# Altium PCB EQF1248.PcbDoc
Units mil, origin at the board's own origin, x right, y up, seen from the top; angles counter-clockwise.
Board outline 2495 x 4497 mil, 2 copper layers (Top Layer, Bottom Layer); 85 components, 59 nets, 303 pads, 58 vias.
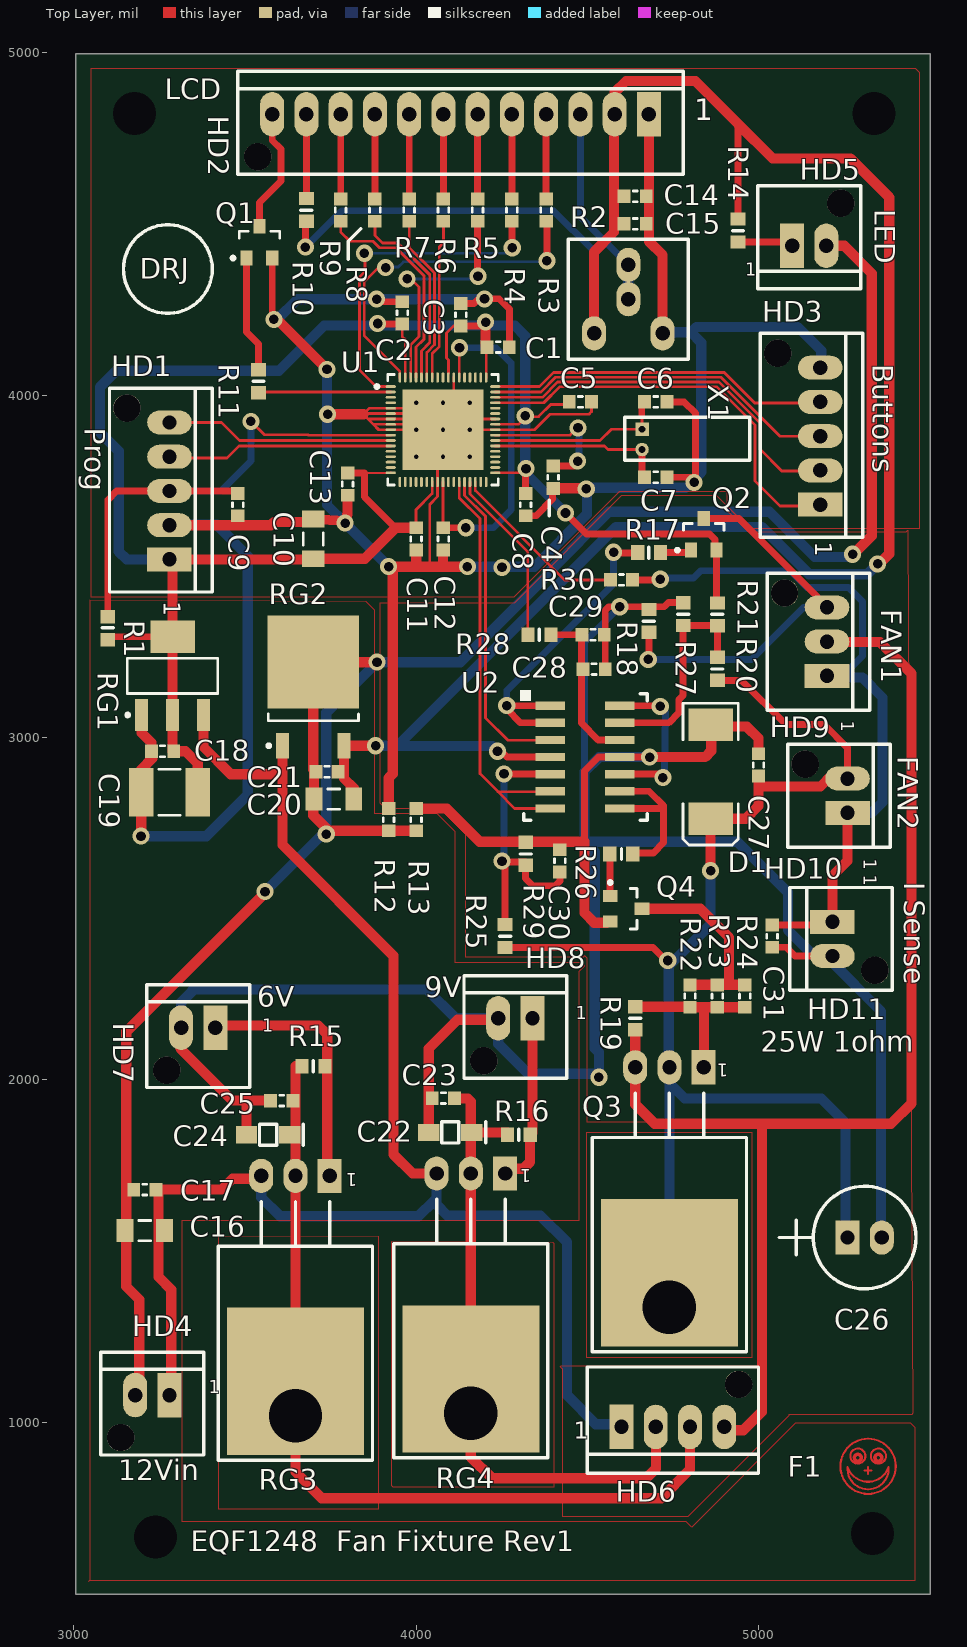
[diagram p0: Top Layer view]
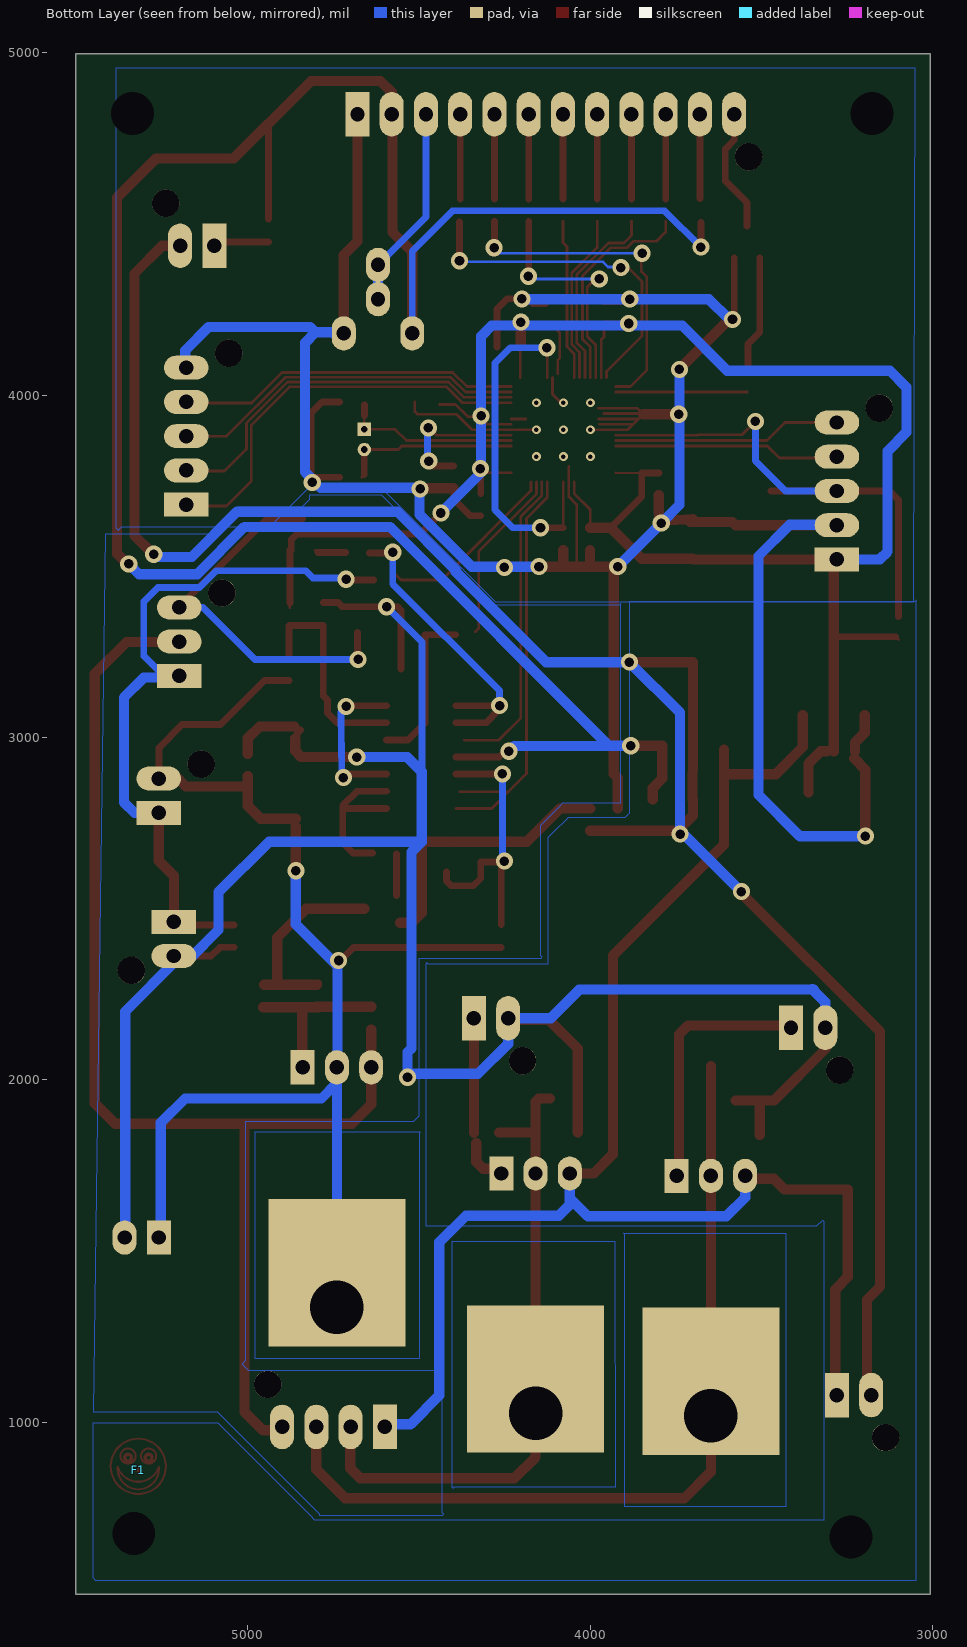
[diagram p1: Bottom Layer view, seen from below]

## Layer stack, top to bottom
Top Layer: signal copper 1.4
Dielectric: dielectric 12.6, FR-4, Dk 4.8
Bottom Layer: signal copper 1.4

## Board outline
3007,4996 3007,499 5502,499 5502,4996

## Design rules (kind name [scope] priority, off if disabled: settings)
Clearance "Poly Clearance" [InNamedPolygon('TopFGND') Or  InNamedPolygon('Bottom6V') Or  InNamedPolygon('Bottom9V') Or  InNamedPolygon('TopGND') Or  InNamedPolygon('BottomCGND') Or  InNamedPolygon('TopCGND') Or  InNamedPolygon('BottomGND') Or  InNamedPolygon('Top6V') Or  InNamedPolygon('Top9V') Or  InNamedPolygon('BottomFGND')] p1: gap=15
Clearance Clearance_U1 [(InComponent('U1'))] p2: gap=6
Clearance "Clearance All" [All] p3: gap=6
HoleSize [All] p1: absolutevalues=TRUE maxlimit=160 minlimit=1 maxpercent=80.000 minpercent=20.000
PolygonConnect [All] p1: connectstyle=Relief reliefconductorwidth=10 reliefentries=4 polygonreliefangle="90 Angle"
RoomDefinition U_FanControl [InComponentClass('U_FanControl')] p1 off: confinementstyle=ConfineIn formatcopy=TRUE lockcomponents=FALSE outline 0,0 2000,0 2000,1000 0,1000
RoomDefinition "U_Display Buttons" [InComponentClass('U_Display Buttons')] p2 off: confinementstyle=ConfineIn formatcopy=TRUE lockcomponents=FALSE outline 0,0 2000,0 2000,1000 0,1000
RoomDefinition U_Cypress [InComponentClass('U_Cypress')] p3 off: confinementstyle=ConfineIn formatcopy=TRUE lockcomponents=FALSE outline 0,0 2000,0 2000,1000 0,1000
RoutingVias [All] p1: holewidth=28 width=50 viastyle="Through Hole" minholewidth=28 minwidth=50 maxholewidth=28 maxwidth=50
SilkToSilkClearance [All] p1: silktosilkclearance=2
SilkscreenOverComponentPads [All] p1: minsilkscreentomaskgap=2
SolderMaskExpansion [All] p1: expansion=4
Width [All] p1: maxlimit=80 minlimit=6 preferedwidth=8 toplayer_maxwidth=50 bottomlayer_minwidth=8 minimp=50.000000 maximp=50.000000 favimp=50.000000
25 further rules are at their usual default settings.

## Classes and differential pairs
component class U_Cypress: C1 C2 C3 C4 C5 C6 C7 C8 C9 C10 C11 C12 C13 F1 HD1 R1 U1 X1
component class "U_Display Buttons": C14 C15 HD2 HD3 Q1 R2 R3 R4 R5 R6 R7 R8 R9 R10 R11 R12 R13
component class U_FanControl: C6 C16 C17 C18 C19 C20 C21 C22 C23 C24 C25 C27 C28 C29 C30 C31 D1 HD4 HD5 HD6 HD7 HD8 HD9 HD10 HD11 Q2 Q3 Q4 R14 R15 R16 R17 R18 R19 R20 R21 R22 R23 R24 R25 R26 R27 R28 R29 R30 RG1 RG2 RG3 RG4 U2

## Components (designator, comment, footprint, x,y, rotation, side; value= is the part's Value field where it differs from the comment)
C1 "CAP_NON_POLAR_SMT" 0603 4240,4140 r0 top
C2 "CAP_NON_POLAR_SMT" 0603 3960,4240 r90 top
C3 "CAP_NON_POLAR_SMT" 0603 4131,4234.48 r90 top
C4 "CAP_NON_POLAR_SMT" 0603 4400,3760 r270 top
C5 "CAP_NON_POLAR_SMT" 0603 4480,3980 r0 top
C6 "22pF_0603" 0603 4700,3980 r0 top
C7 "22pF_0603" 0603 4700,3760 r0 top
C8 "CAP_NON_POLAR_SMT" 0603 4320,3680 r270 top
C9 "CAP_NON_POLAR_SMT" 0603 3480,3680 r270 top
C10 "CAP_NON_POLAR_SMT" 1206 3700,3580 r90 top
C11 "CAP_NON_POLAR_SMT" 0603 4000,3580 r270 top
C12 "CAP_NON_POLAR_SMT" 0603 4080,3580 r270 top
C13 "CAP_NON_POLAR_SMT" 0603 3800,3740 r270 top
C14 "CAP_NON_POLAR_SMT" 0603 4640,4580 r0 top
C15 "1.0uF_0603_16V" 0603 4640,4500 r0 top
C16 "CAP_NON_POLAR_SMT" 1206 3208,1560 r180 top
C17 "CAP_NON_POLAR_SMT" 0603 3208,1680 r180 top
C18 "CAP_NON_POLAR_SMT" 0603 3260,2960 r180 top
C19 "CAP_NON_POLAR_SMT" 1812 3280,2840 r180 top
C20 "CAP_NON_POLAR_SMT" 1206 3760,2820 r180 top
C21 "CAP_NON_POLAR_SMT" 0603 3740,2900 r180 top
C22 "10UF_TANT_16V" EIA3216-18 4100,1847 r180 top
C23 "CAP_NON_POLAR_SMT" 0603 4080,1947 r180 top
C24 "10UF_TANT_16V" EIA3216-18 3568,1840 r180 top
C25 "CAP_NON_POLAR_SMT" 0603 3608,1940 r180 top
C26 "100UF_RP_35V_100" CAP_100RP42 5260,1540 r0 top
C27 "CAP_NON_POLAR_SMT" 0603 5000,2920 r90 top
C28 "CAP_NON_POLAR_SMT" 0603 4520,3200 r0 top
C29 "CAP_NON_POLAR_SMT" 0603 4517,3300 r0 top
C30 "CAP_NON_POLAR_SMT" 0603 4420,2640 r90 top
C31 "CAP_NON_POLAR_SMT" 0603 5040,2420 r270 top
D1 "1N4001" DSO-C2/X3.3 4860,2900 r270 top
F1 "FIDUCIAL_SMILEY" FIDUCIAL_SMILEY 5320,860 r180 bottom
HD1 "HDR5PIN100SHRD" HDR5PIN100SHRD 3280,3520 r90 top
HD2 "HDR12PIN100SHRD" HDR12PIN100SHRD 4680,4820 r180 top
HD3 "HDR5PIN100SHRD" HDR5PIN100SHRD 5180,3680 r90 top
HD4 "HDR2PIN100SHRD" HDR2PIN100SHRD 3280,1080 r180 top
HD5 "HDR2PIN100SHRD" HDR2PIN100SHRD 5098,4436 r0 top
HD6 "HDR4PIN100SHRD" HDR4PIN100SHRD 4600,987 r0 top
HD7 "HDR2PIN100SHRD" HDR2PIN100SHRD 3414,2153 r180 top
HD8 "HDR2PIN100SHRD" HDR2PIN100SHRD 4340,2180 r180 top
HD9 "HDR3PIN100SHRD" HDR3PIN100SHRD 5200,3180 r90 top
HD10 "HDR2PIN100SHRD" HDR2PIN100SHRD 5260,2780 r90 top
HD11 "HDR2PIN100SHRD" HDR2PIN100SHRD 5216,2462 r270 top
Q1 "NPN_TRANSISTOR" SOT23-3 3505.2,4400 r90 top
Q2 "PNP_TRANSISTOR" SOT23-3 4802.6,3547.09 r90 top
Q3 "TIP32" TO-220-NORMAL 4840,2037 r180 top
Q4 "2N4401_SOT23" SOT23-3 4567.09,2537.4 r0 top
R1 "R0603REFLOW_5%_1/8WATT" RC0603REFLOW-IPC 3100,3320 r270 top
R2 "POT 6MM 10K" "6MM POT" 4520,4180 r0 top
R3 "Resistor_0603_5%" 0603 4380,4540 r90 top
R4 "Resistor_0603_5%" 0603 4280,4540 r90 top
R5 "Resistor_0603_5%" 0603 4180,4540 r90 top
R6 "Resistor_0603_5%" 0603 4080,4540 r90 top
R7 "Resistor_0603_5%" 0603 3980,4540 r90 top
R8 "Resistor_0603_5%" 0603 3880,4540 r90 top
R9 "Resistor_0603_5%" 0603 3780,4540 r90 top
R10 "R0603REFLOW_5%" RC0603REFLOW-IPC 3680,4540 r90 top
R11 "R0603REFLOW_5%" RC0603REFLOW-IPC 3540,4040 r90 top
R12 "Resistor_0603_5%" 0603 3920,2760 r90 top
R13 "Resistor_0603_5%" 0603 4000,2760 r270 top
R14 "R0603REFLOW_5%" RC0603REFLOW-IPC 4940,4480 r90 top
R15 "R0603REFLOW_5%" RC0603REFLOW-IPC 3700,2040 r0 top
R16 "R0603REFLOW_5%" RC0603REFLOW-IPC 4300,1840 r0 top
R17 "R0603REFLOW_5%" RC0603REFLOW-IPC 4680,3540 r0 top
R18 "R0603REFLOW_5%" RC0603REFLOW-IPC 4680,3340 r90 top
R19 "R0603REFLOW_5%" RC0603REFLOW-IPC 4640,2180 r90 top
R20 "R0603REFLOW_5%" RC0603REFLOW-IPC 4880,3200 r90 top
R21 "R0603REFLOW_5%" RC0603REFLOW-IPC 4880,3360 r270 top
R22 "Resistor_0603_1%" 0603 4800,2245 r90 top
R23 "Resistor_0603_1%" 0603 4880,2245 r90 top
R24 "Resistor_0603_1%" 0603 4960,2245 r90 top
R25 "R0603REFLOW_5%" RC0603REFLOW-IPC 4260,2420 r90 top
R26 "R0603REFLOW_5%" RC0603REFLOW-IPC 4600,2660 r180 top
R27 "R0603REFLOW_5%" RC0603REFLOW-IPC 4780,3360 r90 top
R28 "R0603REFLOW_5%" RC0603REFLOW-IPC 4360,3300 r0 top
R29 "R0603REFLOW_5%" RC0603REFLOW-IPC 4320,2660 r90 top
R30 "Resistor_0603_5%" 0603 4600,3460 r0 top
RG1 "LM1117SPX-3.3_SOT223" SOT-223 3289,3180 r90 top
RG2 "REGULATOR_DPAK" DPAK 3610.24,2975.91 r90 top
RG3 "LM1085_TO220" TO-220-NORMAL 3748,1720 r180 top
RG4 "LM1085_TO220" TO-220-NORMAL 4260,1727 r180 top
U1 "CY8C3246LTI-128 QFN68" QFN68_8x8-MD 4078.74,3898.74 r0 top
U2 "LM324_SOIC14" SOIC14REFLOW-IPC 4495,2943 r270 top
X1 "32.768KHZ_CRYSTAL" .03_Small_Footprint_CRYSTAL 4660,3900 r270 top

## Footprints (in the part's own frame and the unit in brackets; to place one, negate y for a bottom-side part, rotate by r counter-clockwise, add the part's x,y. Pads: shape width x height; smd on the part's side, far side on the other; paste and mask are expansions set on the pad)
"6MM POT" [mil]
  oval 70x100 hole 42: 1(0,0) 2(100,100) 3(100,200) 4(200,0)
  silkscreen extent -75,-75 275,275
0603 [mm] "Chip Resistor, 2-Leads, Body 1.6x0.8mm, IPC Medium Density"
  rect 0.95x1 smd: 1(-0.825,0) 2(0.825,0)
  silkscreen extent -0.15,-0.4 0.15,0.4
1206 [mm] "Chip Resistor, 2-Leads, Body 3.1x1.6mm, IPC Medium Density"
  rect 1.25x1.7 smd: 1(-1.475,0) 2(1.475,0)
  silkscreen extent -0.45,-0.75 0.45,0.75, body extent -1.63,-0.82 1.62,0.82, height 0.7
1812 [mm] "Chip Capacitor, 2-Leads, Body 4.5x3.2mm, IPC Low Density"
  rect 1.8x3.6 smd: 1(-2.1,0) 2(2.1,0)
  silkscreen extent -0.8,-1.7 0.8,1.7
.03_Small_Footprint_CRYSTAL [mm] "Small Footprint_ECS-.327-12.5-13"
  rect 1x1 hole 0.5: 1(0,0)
  round 1 hole 0.5: 2(1.5,0)
  silkscreen extent -0.89,-1.27 2.29,8, body extent -0.38,-0.35 1.71,7.67, height 2.1
CAP_100RP42 [mil]
  rect 70x100 hole 42: 1(0,0)
  oval 70x100 hole 42: 2(100,0)
  silkscreen extent -200,-150 200,150
DPAK [mm] "D-PAK, 3-Pads, Body 6.2x6.7mm (max), IPC Medium Density"
  rect 1.9x0.95 smd: 1(0,0) 3(0,-4.56)
  rect 6.9x6.8 smd: 4(6.2,-2.28)
  silkscreen extent -0.12,-5.63 2.35,1.15, body extent -0.42,-5.56 9.52,0.98, height 2.28
DSO-C2/X3.3 [mm] "DO-214-AB/SMC; 2 C-Bend Leads; Body 7.9 x 5.9 mm, inc. leads (LxW)"
  rect 2.4x3.3 smd: 1(-3.475,0) 2(3.475,0)
  silkscreen extent -5.07,-2.05 5.43,2.05
EIA3216-18 [mil]
  rect 62x50 smd: 1(-63,0) 2(63,0)
  silkscreen extent -103,-31 25,31
FIDUCIAL_SMILEY [mil]
  Bottom Layer circle w6: c-30,42 r22
  Bottom Layer circle w10: c-30,37 r10
  Bottom Layer circle w6: c30,42 r22
  Bottom Layer circle w10: c30,37 r10
  Bottom Layer circle w6: c0,12 r80.71
  Bottom Layer pour cut-out: -60,110 -105,65 -105,-40 -55,-90 50,-90 105,-40 105,60 55,110
  Bottom Layer lines w6: 10,0 -10,0 ; 0,-10 0,10 ; 60,10 cw(c0,30) -60,10 ccw(c0,5) 60,10
HDR2PIN100SHRD [mil]
  rect 70x130 hole 42: 1(0,0)
  oval 70x130 hole 42: 2(100,0)
  round 80 hole 80 unplated: 3(142,124)
  silkscreen extent -100,-125 200,175, body extent -92,-133 192,180, height 400
HDR3PIN100SHRD [mil]
  rect 70x130 hole 42: 1(0,0)
  oval 70x130 hole 42: 2(100,0) 3(200,0)
  round 80 hole 80 unplated: 4(242,124)
  silkscreen extent -100,-125 300,175, body extent -92,-138 292,175, height 400
HDR4PIN100SHRD [mil]
  rect 70x130 hole 42: 1(0,0)
  oval 70x130 hole 42: 2(100,0) 3(200,0) 4(300,0)
  round 80 hole 80 unplated: 5(342,124)
  silkscreen extent -100,-135 400,175, body extent -95,-138 390,175, height 400
HDR5PIN100SHRD [mil]
  rect 70x130 hole 42: 1(0,0)
  oval 70x130 hole 42: 2(100,0) 3(200,0) 4(300,0) 5(400,0)
  round 80 hole 80 unplated: 6(442,124)
  silkscreen extent -95,-125 500,175, body extent -92,-138 492,175, height 400
HDR12PIN100SHRD [mil]
  rect 70x130 hole 42: 1(0,0)
  oval 70x130 hole 42: 2(100,0) 3(200,0) 4(300,0) 5(400,0) 6(500,0) 7(600,0) 8(700,0) 9(800,0) 10(900,0) 11(1000,0) 12(1100,0)
  round 80 hole 80 unplated: 13(1142,124)
  silkscreen extent -100,-125 1200,175, body extent -92,-133 1192,180, height 400
QFN68_8x8-MD [mm] "QFN, 68-Leads, Body 8.1x8.1mm (max), Pitch 0.40mm, Medium Density"
  oval 0.75x0.2 smd: 1(-3.875,3.2) 2(-3.875,2.8) 3(-3.875,2.4) 4(-3.875,2) 5(-3.875,1.6) 6(-3.875,1.2) 7(-3.875,0.8) 8(-3.875,0.4) 9(-3.875,0) 10(-3.875,-0.4) 11(-3.875,-0.8) 12(-3.875,-1.2) 13(-3.875,-1.6) 14(-3.875,-2) 15(-3.875,-2.4) 16(-3.875,-2.8) 17(-3.875,-3.2) 35(3.875,-3.2) 36(3.875,-2.8) 37(3.875,-2.4) 38(3.875,-2) 39(3.875,-1.6) 40(3.875,-1.2) 41(3.875,-0.8) 42(3.875,-0.4) 43(3.875,0) 44(3.875,0.4) 45(3.875,0.8) 46(3.875,1.2) 47(3.875,1.6) 48(3.875,2) 49(3.875,2.4) 50(3.875,2.8) 51(3.875,3.2)
  oval 0.2x0.75 smd: 18(-3.2,-3.875) 19(-2.8,-3.875) 20(-2.4,-3.875) 21(-2,-3.875) 22(-1.6,-3.875) 23(-1.2,-3.875) 24(-0.8,-3.875) 25(-0.4,-3.875) 26(0,-3.875) 27(0.4,-3.875) 28(0.8,-3.875) 29(1.2,-3.875) 30(1.6,-3.875) 31(2,-3.875) 32(2.4,-3.875) 33(2.8,-3.875) 34(3.2,-3.875) 52(3.2,3.875) 53(2.8,3.875) 54(2.4,3.875) 55(2,3.875) 56(1.6,3.875) 57(1.2,3.875) 58(0.8,3.875) 59(0.4,3.875) 60(0,3.875) 61(-0.4,3.875) 62(-0.8,3.875) 63(-1.2,3.875) 64(-1.6,3.875) 65(-2,3.875) 66(-2.4,3.875) 67(-2.8,3.875) 68(-3.2,3.875)
  rect 2x2 smd paste-0.15 mask-0.15: 69(-2,-2) 69(-2,0) 69(-2,2) 69(0,-2) 69(0,0) 69(0,2) 69(2,-2) 69(2,0) 69(2,2)
  silkscreen extent -5.02,-4.1 4.1,4.1, body extent -4.05,-4.05 4.05,4.05, height 1
RC0603REFLOW-IPC [mil]
  rect 39x43 smd: 1(-33,0) 2(34,0)
  silkscreen extent 0,-16 0,16
SOIC14REFLOW-IPC [mil]
  rect 24x87 smd: 1(-150,-103) 2(-100,-103) 3(-50,-103) 4(0,-103) 5(50,-103) 6(100,-103) 7(150,-103) 8(150,100) 9(100,100) 10(50,100) 11(0,100) 12(-50,100) 13(-100,100) 14(-150,100)
  silkscreen extent -195,-190 185,180
SOT23-3 [mm] "SOT23, 3-Leads, Body 3.0x2.8mm (max), Pitch 0.95mm, IPC Medium Density"
  rect 1.1x0.9 smd: 1(0,0) 2(0,-1.9) 3(2.36,-0.95)
  silkscreen extent -0.12,-2.45 1.98,1.12, body extent 0.38,-2.47 1.98,0.57, height 1.4
SOT-223 [mm] "SOT223, 4-Leads, Body 6.7x7.3mm (max), Pitch 2.30mm, IPC Medium Density"
  rect 2.4x0.95 smd: 1(-2.9,2.3) 2(-2.9,0) 3(-2.9,-2.3)
  rect 2.4x3.3 smd: 4(2.9,0)
  silkscreen extent -3.02,-3.35 1.3,3.45, body extent -1.85,-3.35 1.85,3.35, height 1.8
TO-220-NORMAL [mil]
  rect 70x100 hole 42: 1(0,0)
  oval 70x100 hole 42: 2(100,0) 3(200,0)
  rect 400x430 hole 156 copper offset 0,-100: 4(100,700)
  silkscreen extent -125,75 325,830

## Part data
C1 C2 C3 C4 C5 C8 C9 C11 C12 C13 C14 C17 C18 C21 C23 C25 C27 C28 C30: library part 264790, "Capacitor, 0.1uF, 50V, Ceramic, X7R, +/- 20%, Non-Polar, 0603, Kemet: C0603C104M5RACTU or equivalent"
C6 C7: library part 19574, "Capacitor, 22pF, 50, Ceramic, NPO, +/-5%, Non-Polar, 0603, 2, Kemet:C0603C220J5GACTU or equivalent"
C10 C16 C20: library part 265299, "Capacitor, 10uF, 50V, Ceramic, X5R, +/- 20%, Non-Polar, 1206, Taiyo Yuden: UMK316BBJ106ML-T or equivalent"
C15: library part 18838, "Capacitor, 1uF, 16V, Ceramic, X5R, +/- 10%, Non-Polar, 0603, 2, MURATA: GRM188R61C105KA93D OR EQUIVALENT"
C19: library part 265012, "Capacitor, 1uF, 50V, Ceramic, Z5U, +/- 20%, Non-Polar, 1812, Kemet: C1812C105M5UACTU or equivalent"
C22 C24: library part 10669, "Capacitor, 10uF, 16V, Tantalum, General Purpose, +/- 20%, Polar, EIA 3216-18, KEMET: T491A106M016AS or Exact Equivalent"
C26: library part 3428, "Capacitor, 100uF, 35V, Electrolytic, +/- 20%, Radial, Polar, 0.1 in., Nichicon: UVR1V101MED or Equivalent"
C29 C31: library part 265218, "Capacitor, 1uF, 50V, Ceramic, X5R, +/- 20%, SMT, Non-Polar, 0603, TDK: C1608X5R1H105M080 or equivalent"
D1: library part Diode, "Default Diode"
F1: library part 264290, "Fiducial, Smiley, PCB reference point, not a component"
HD1 HD3: library part 1770, "Header, 0.100 in., 5 pin Pins, Shrouded, AMP: 644486-5"
HD2: library part 1763, "Header, 0.1 in., 12 pins Pins, Shrouded, AMP: 1-64486-2"
HD4 HD5 HD7 HD8 HD10 HD11: library part 1766, "Header, 0.100 in., 2 Pins, Shrouded, AMP: 644486-2"
HD6: library part 1768, "Header, 0.100 in., 4 pin Pins, Shrouded, AMP: 644486-4"
HD9: library part 1767, "Header, 0.100 in., 3 pin Pins, Shrouded, AMP: 644486-3"
Q1: library part 265442, "Transistor, MMBT4401, 40V, SOT23-3, 500mA, NPN, Transistor, On Semi: MMBT4401LT1"
Q2: library part 18850, "Transistor, MMBT4403, 40V, SOT23-3, PNP, Transistor, On Semi: MMBT4403LT1"
Q3: library part 2637, "Transistor, TIP32, 40V, TO-220, 3A, PNP, Any"
Q4: library part 18848, "Transistor, MMBT4401, 40V, SOT23, 500mA, 3, NPN, Transistor, On Semi: MMBT4401LT1"
R1: library part 15593, "Resistor, 18, ThickFilm, 5%, 0603, 1/8W, Any"
R2: library part 6440, "Resistor, 10K, Carbon, 20%, 0.2 in X 0.1 in or 0.2 in X 0.2 in, 0.1W, Panasonic: EVN-D8AA03B14"
R3 R4 R5 R6 R7 R8 R9 R30: library part 18857, "Resistor, 10K, ThickFilm, 5%, 0603, 1/10W, 2, Any"
R10: library part 13093, "Resistor, 5.1, ThickFilm, 5%, 0603, 1/10W, Any"
R11: library part 2044, "Resistor, 1K, ThickFilm, 5%, 0603, 1/10W, Any"
R12 R13: library part 18844, "Resistor, 0, ThickFilm, 5%, 0603, 1/10W, 2, Any"
R14: library part 2403, "Resistor, 130, ThickFilm, 5%, 0603, 1/10W, Any"
R15 R16: library part 5495, "Resistor, 120, ThickFilm, 5%, 0603, 1/10W, Any"
R17 R18: library part 2051, "Resistor, 10K, ThickFilm, 5%, 0603, 1/10W, Any"
R19 R29: library part 2046, "Resistor, 100K, ThickFilm, 5%, 0603, 1/10W, Any"
R20: library part 2157, "Resistor, 15K, ThickFilm, 5%, 0603, 1/10W, Any"
R21: library part 5186, "Resistor, 330K, ThickFilm, 5%, 0603, 1/10W, Any"
R22 R23 R24: library part 20273, "Resistor, 750, 1%, 0603, 1/10W, 2, Any"
R25: library part 14583, "Resistor, 270K, ThickFilm, 5%, 0603, 1/10W, Any"
R26: library part 2071, "Resistor, 4.7K, ThickFilm, 5%, 0603, 1/10W, Any"
R27: library part 6345, "Resistor, 7.5K, ThickFilm, 5%, 0603, 1/10W, Any"
R28: library part 2052, "Resistor, 1M, ThickFilm, 5%, 0603, 1/10W, Any"
RG1: library part 18870, "Regulator, LM1117MPX-3.3, 3.3V, SOT223, 800mA, 4, LDO, National: LM117MPX-3.3"
RG2: library part 265303, "Regulator, L78M05CDT-TR, 5V, DPAK, 500mA, Linear, ST: L78M05CDT-TR or equivalent"
RG3 RG4: library part 283929, "Regulator, LM1085, Adjustable, TO-220, 3A, LDO, Texas Instruments"
U1: library part "CY8C3xxxLTx-xxx QFN68", "CY8C3xxxLTx-xxx 68 pin QFN"
U2: library part 1795, "IC, LM324, SOIC, 14 pin, Op-Amp, National Semiconductor"
X1: library part 19127, "Xtal, 0.7 mm, Cylinder, 2, Crystal, 32.768KHz, ECS: ECS-.327-12.5-13;Alternates require approval"

## Free pads (board coordinates)
  round 60 hole 125 unplated mask+52.5: 0(3178,4822) 0(3239,666) 0(5333,676) 0(5337,4822)

## Via types
v1: diameter 50, hole 28, Top Layer to Bottom Layer, 49 vias
v2: diameter 25.98, hole 12.99, Top Layer to Bottom Layer, tented top, 9 vias

## Nets (pads, with @x,y where several pads share a name; then routed paths per layer and width w, separated by ;. In a path a pad name is that pad's centre, name@x,y a point inside that pad or via, vN(x,y) a via of type N, cw(c..) or ccw(c..) an arc to the next point about the centre after c; other vN are vias at no path point)
3.3V: C1.1 C2.1 C3.1 C5.1 C8.1 C10.1 C11.1 C13.1 C18.1 C19.1 HD1.1 Q2.2 R1.2 R21.1 RG1.2 RG1.4 U1.17 U1.24 U1.35 U1.44 U1.52 U1.59 U1.67 | length 6451.5
  Top Layer w8: R1.2 R1.2@3108.17,3294.17 ; HD1.1@3289,3522.17 HD1.1@3294.47,3520 ; C19.1 3362.68,2915.32 ; 3850,3772 U1.17 ; v1(3888,4209) v1@3889.48,4207.52 ; C2.1@3960,4199 3960,4170 3968.5,4161.5 U1.67 ; C11.1 4000,3665 4047.24,3712.24 U1.24 ; U1.59@4095,4062 4095,4102 4089,4108 4089,4181 4110,4202 C3.1 ; U1.52 C1.1@4204.72,4126.72 ; U1.35 v1@4320,3772.76 ; U1.44 4299.74,3914.49 4312,3926.74 4331.26,3926.74 4341.51,3937 4358,3937 4393.48,3972.48 C5.1@4440,3972.48 ; R21.1@4877.4,3380 R21.1@4877.4,3393
  Top Layer w20: R1.2@3108.17,3294.17 RG1.4 ; C13.1 3850,3772 3850,3702.96 3940.48,3612.48 ; v1@3889.48,4207.52 C2.1 ; C3.1 v1@4199,4202 ; C8.1 v1@4320,3772.76 ; v1(4436.5,3655.5) 4498,3594 4857,3594 4873.16,3577.84 Q2.2@4873.16,3547.09 ; R21.1@4877.4,3393 Q2.2
  Top Layer w30: HD1.1 HD1.1@3289,3520 ; C18.1@3289,2960 RG1.2 ; RG1.2@3289,3046 RG1.2 ; HD1.1@3289,3522.17 HD1.1@3289,3520 ; C18.1@3309,2960 3327,2960 3362.68,2924.32 C19.1 ; C10.1@3698.07,3520 3294.47,3520 HD1.1@3289,3520 ; C10.1 3849.93,3521.93 3940.48,3612.48 C11.1 ; C1.1@4203,4144.52 v1(4203,4213) ; RG1.2 RG1.4 HD1.1@3289,3520
  Bottom Layer w8: v1@4319,3787 v1(4321,3785) v1@4321,3771
  Bottom Layer w30: HD1.1 3155,3520 3132,3543 3132,3836 3077,3891 3077,4023 3125,4071 3600,4071 3732,4203 4288,4203 4319,4172 v1(4319,3939) v1@4319,3787 ; v1@4321,3771 v1(4436.5,3655.5)
5V: C14.1 C15.1 C20.1 C21.1 HD2.2 R2.1 R10.1 R14.2 RG2.3 U2.4 | length 6717.8
  Top Layer w8: R10.1@3677.07,4504.07 R10.1 ; RG2.3 RG2.3@3789.86,2976 ; 4939.09,4792.91 4940,4792
  Top Layer w20: v1(3677.07,4432.07) R10.1@3677.07,4504.07 ; v1@4243.5,2965.5 4266,2943 U2.4 ; R14.2 4940,4792
  Top Layer w30: RG2.3 3789.76,2880.24 3818.07,2851.93 C20.1 ; RG2.3@3789.86,2976 v1(3882,2976) ; R2.1@4520,4220 4520,4418 4578,4476 4578,4500 4578,4753 ; HD2.2@4580,4800 HD2.2 4580,4884 4613,4917 4815,4917 4939.09,4792.91 ; 4940,4792 5041,4691 5268,4691 5382,4577 5382,3537 5352,3507 v1(5348,3507)
  Bottom Layer w8: v1@3672,4427 v1(3677.07,4432.07) ; v1@3876,2976 v1(3882,2976) v1@3884,2976
  Bottom Layer w20: v1(3677.07,4432.07) 3783,4538 4402,4538 4520,4420 R2.1@4520,4220
  Bottom Layer w30: v1@3888,2980 3884,2976 3946,2976 4585,3615 5010,3615 5148,3477 5318,3477 v1(5348,3507) v1@5352,3507 ; 3941,2975 4223,2975 v1(4238,2960)
6VDC: C24.1 C25.1 HD6.3 R15.1 RG3.2 RG3.4 | length 2505.7
  Top Layer w30: R15.1@3648,2040 3648,1940 3648,1840 RG3.2 RG3.4 3648,856 3725,779 4716,779 4800,863 HD6.3@4800,966
9VDC: C22.1 C23.1 HD6.2 R16.1 RG4.2 RG4.4 | length 1858.4
  Top Layer w30: C23.1@4118,1946 4151,1946 4160,1937 4160,1847 RG4.2 RG4.4 4160,899 4222,837 4672,837 4701,866 HD6.2@4701,958 ; C22.1 R16.1@4267,1847
12VIN: C16.1 C17.1 HD4.1 HD6.1 RG1.3 RG2.1 RG3.3 RG4.3 | length 4509.2
  Top Layer w30: HD4.1@3285,1126 3285,1388 3248,1425 3248,1680 3432,1680 3464,1712 RG3.3@3545,1712 ; RG1.3 3379.55,2972.45 3459,2893 3610,2893 ; RG2.1@3610,2964 3610,2893 ; RG4.3 3990,1727 3934,1783 3934,2363 3610,2687 3610,2893
  Bottom Layer w30: RG3.3 3548,1657 3603,1602 4007,1602 4053,1648 ; RG4.3 4060,1636 4092,1604 4363,1604 4441,1526 4441,1079 4525,995 4597,995 4589,987 HD6.1@4589,955
CGND: C1.2 C2.2 C3.2 C4.2 C5.2 C6.2 C7.2 C8.2 C9.2 C10.2 C11.2 C12.2 C13.2 C14.2 C15.2 C18.2 C19.2 HD1.2 HD2.1 HD3.5 Q1.2 R2.4 R12.2 RG1.1 U1.5 U1.6 U1.7 U1.8 U1.9 U1.25 U1.43 U1.45 U1.58 U1.69 | length 9868.7
  Top Layer w8: v1(3585,4221) v1@3594,4221 ; v1@3731,4075 v1(3740,4075) ; U1.69@3961,3945.98 U1.6 3847.98,3945.98 ; U1.69@3973,3914.49 U1.8 3875.51,3914.49 ; U1.69@3976,3930.24 U1.7 3859.76,3930.24 ; U1.69@3976,3961.73 U1.5 3863.73,3961.73 3847.98,3945.98 ; U1.69@3984,3898.74 U1.9 3891.26,3898.74 3875.51,3914.49 ; 4040,3499 4040,3681 4062.99,3703.99 U1.25 U1.69@4062.99,3792 ; v2(4078.74,3977.48) 4085.91,3977.48 U1.69@4108.43,4000 ; U1.69@4110.24,4001.81 U1.58 ; v2(4157.48,3898.74) U1.43 4345.74,3898.74 4391,3944 4505,3944 4512.48,3951.48 C5.2 ; U1.69@4188.98,3930.24 U1.45 ; C4.2@4399,3726.52 C4.2 ; 3847.98,3945.98 3846,3944 3859.76,3930.24 ; 3859.76,3930.24 3875.51,3914.49
  Top Layer w20: v1@3580,4226 Q1.2 ; v1@3892.52,4272.48 C2.2 ; C3.2 4168.96,4266.96 v1@4183,4281 ; v1@4212,4281 4243,4281 4273,4251 C1.2@4273,4140 ; C8.2 4350.52,3647.52 4399,3696 C4.2@4399,3726.52 ; C7.2 4812,3760 4816,3760 4816,3947 4783,3980 C6.2
  Top Layer w30: v1@3197.32,2720.32 C19.2 3197.32,2906.32 3230,2939 ; RG1.1 3198.45,3013.55 3227.52,2984.48 C18.2 ; HD1.2 3480,3620 3576,3620 3585,3629 3700,3629 C10.2@3708,3629 ; v1@3594,4221 v1(3740,4075) ; C10.2 v1@3793.39,3632.24 ; v1(3742,3944) 3846,3944 3831,3944 ; v1@3798,3634 3800,3661 C13.2 ; R12.2 3920,2882 3932,2894 v1@3932,3499 ; v1(3920,3499) v1@3932,3499 ; C11.2@4001,3546.52 4001,3499 ; C12.2@4079,3546.52 4079,3499 ; v1(4150,3499) 4079,3499 ; C4.2 v1@4497,3727.52 ; HD2.1@4680,4800 4680,4580 4680,4500 4680,4449 4720,4409 R2.4@4720,4220 ; v1@3932,3499 4001,3499 ; 4001,3499 4040,3499 4079,3499
  Bottom Layer w20: R2.4@4720,4173 4723.5,4176.5 4730,4183 R2.4@4753,4183 ; HD3.5@5154,4095 HD3.5@5159.5,4100.5 ; HD3.5@5166,4067 HD3.5@5166,4080 ; HD3.5@5183,4079 HD3.5@5183,4080
  Bottom Layer w30: v1(3197,2712) 3388,2712 3509,2833 3509,3530 3418,3621 HD1.2@3314,3621 ; v1@3595,4221 3654,4280 v1(3885,4280) v1@4199,4280 ; v1(3740,4075) 3740,3944 3740,3679 v1(3793,3626) v1(3920,3499) ; v1(4150,3499) 4251,3499 4346,3499 4499,3652 v1@4499,3724 ; v1@4504,3729 4787,3729 ; R2.4@4728,4158 4735,4165 4753,4183 4803,4183 ; v1@4807.5,3749.5 4833,3775 4833,4153 4803,4183 ; HD3.5@5183,4080 5183,4130 5114,4199 4819,4199 4803,4183
  other v1: 4251,3497 4497,3726 4812,3745 4200,4281
  other v2: 4000,3820 4078.74,3820 4157.48,3820 4000,3898.74 4078.74,3898.74 4000,3977.48 4157.48,3977.48
FAN_GND: C22.2 C23.2 C24.2 C25.2 C26.2 C27.2 C28.2 C29.2 C30.2 C31.2 D1.1 HD7.2 HD8.2 HD11.2 Q4.2 R13.1 R18.2 R27.2 R29.2 U2.11 | length 8078
  Top Layer w8: 3503,1940 3505,1938 ; D1.1 D1.1@4864.81,3032
  Top Layer w20: 4410,2696 4420,2696 ; 4492,2696 4492,2902 4533,2943 U2.11 v1(4682,2943) ; C28.2 4552.48,3300 4552.48,3371.52 4562.96,3382 v1(4595,3382) 4680,3382 4725,3382 4737,3394 R27.2 ; D1.1@4846,3022 D1.1@4857,3011 ; C31.2 5081.48,2387.52 5107,2362 HD11.2
  Top Layer w30: HD7.2@3328,2137 3312,2121 3312,2092 3464,1940 3503,1940 C25.2 ; C24.2 3505,1938 ; R13.1 4089.52,2792.48 4186,2696 4320,2696 4410,2696 ; C22.2 4037,1947 4037,2092 4121,2176 4240,2176 HD8.2@4260,2176 ; 4420,2696 4481,2696 ; 4492,2696 4492,2487.77 4520.77,2459 Q4.2@4556.09,2459 ; v1(4682,2943) 4844,2943 4862,2961 D1.1@4862,2997 ; D1.1@4864.81,3032 4966,3032 5000,2998 C27.2
  Bottom Layer w20: 4492,2900 4492,3279 v1(4595,3382)
  Bottom Layer w30: HD7.2 3314,2227 3351,2264 ; 3347,2264 3351,2264 ; 3352,2265 3351,2264 ; HD8.2@4232.5,2172.5 4240,2165 4240,2106 4328,2018 v1@4534,2018 ; HD8.2 4116,2180 4032,2264 3351,2264 ; v1@4534,2019 4534,2081 4522,2093 4522,2666 4492,2696 ; v1(4682,2943) 4535,2943 4492,2900 4492,2696 ; HD11.2@5167,2357 5086,2438 5086,2548 4938,2696 4492,2696 ; HD11.2@5206,2352 5358,2200 5358,1550 5364,1544 C26.2@5366,1542
  other v1: 4534,2008
GND: C16.2 C17.2 C20.2 C21.2 HD4.2 HD5.2 R12.1 R13.2 RG2.4 | length 5980.4
  Top Layer w8: RG2.4 RG2.4@3707.52,3212.48 ; C21.2@3701.93,2894.41 C21.2
  Top Layer w30: HD4.2@3192,1117 3192,1359 3154,1397 3154,1560 3154,1680 3154,2141 v1@3553,2540 ; C20.2@3700,2820 3700,2773 3745.48,2727.52 R12.1 R13.2 ; C21.2@3700,2907.52 RG2.4 v1(3886,3220) ; C20.2 C21.2@3701.93,2894.41 ; HD5.2 5250,4436 5331,4355 5331,3589 v1@5287,3545
  Bottom Layer w30: v1(3559,2550) v1@3727,2718 ; v1(3738,2718) 3738,3072 v1(3886,3220) 4128.91,3220 4393,3484.09 ; 4393,3489 4563,3659 5032,3659 5164,3527 v1@5275,3527
  other v1: 5275,3535
NetC4_1: C4.1 U1.42 | length 441.4
  Top Layer w8: U1.42 4449.99,3882.99 v1@4465,3898
  Top Layer w20: C4.1 v1@4462.48,3792.48
  Bottom Layer w8: v1@4462,3805 4471.52,3803.64 4476,3803 v1@4476,3807 ; v1(4473,3904) v1@4468,3904 ; v1@4476,3900 4472,3902 v1@4468,3904 ; v1@4468,3904 4465,3904 4462,3907 v1@4468,3904
  Bottom Layer w20: v1@4476,3807 v1@4476,3900
  other v1: 4472,3807
NetC6_1: C6.1 U1.41 X1.1 | length 514.2
  Top Layer w8: U1.41 4537.24,3867.24 4570,3900 X1.1 4660,3939 4659,3940
  Top Layer w20: 4659,3940 C6.1@4659,3971.48
NetC7_1: C7.1 U1.40 X1.2 | length 505.7
  Top Layer w8: U1.40 4550.39,3851.5 ; 4551.89,3850 4560.94,3840.94 4644.06,3840.94 X1.2@4660,3825 ; C7.1@4660,3767.52 C7.1
  Top Layer w20: C7.1@4660,3767.52 X1.2@4660,3825
NetC9_1: C9.1 HD1.3 R1.1 U1.10 | length 1538.5
  Top Layer w8: v1(3518,3923) 3557,3884 3685,3884 3686.01,3882.99 U1.10
  Top Layer w20: R1.1 3100,3694 3126,3720 HD1.3 C9.1@3472.48,3720
  Bottom Layer w20: HD1.3 3430,3720 3518,3808 v1(3518,3923)
NetC12_1: C12.1 U1.26 U1.57 | length 1024.4
  Top Layer w8: C12.1@4078.74,3612.48 U1.26 ; U1.57 v1@4125.98,4124.02
  Top Layer w20: C12.1 v1(4145.48,3612.48)
  Bottom Layer w20: v1(4127,4138) 4234,4138 4278,4094 4278,3665 4225.48,3612.48 v1(4145.48,3612.48)
NetC26_1: C26.1 C27.1 D1.2 HD10.2 Q3.2 Q3.4 R20.1 R25.1 | length 3910.6
  Top Layer w8: Q3.4@4740,1347 4745,1342 Q3.4@4782,1305 ; D1.2 D1.2@4863.19,2760 ; HD10.2@5212,2888 5252,2888 HD10.2
  Top Layer w20: R25.1 4692,2387 v1@4725,2354 ; R20.1 4951,3167 5080,3038 5192,3038 5260,2970 HD10.2
  Top Layer w30: v1(4860,2611) D1.2@4860,2740 ; D1.2 4962.19,2763.19 5000,2801 C27.1 ; 5015.52,2857 5181,2857 HD10.2@5212,2888
  Bottom Layer w30: Q3.2@4738,2058 4738,2333 4744.5,2339.5 4860,2455 v1(4860,2611) ; Q3.4 Q3.2@4740,1991 ; Q3.2@4740,2047 Q3.2 Q3.2@4740,1991 ; C26.1@5254,1566 5254,1875 5183,1946 4785,1946 Q3.2@4740,1991
  other v1: 4735,2349
NetC28_1: C28.1 C29.1 R28.2 U2.12 | length 480.9
  Top Layer w8: C29.1@4482.8,3300 C29.1
  Top Layer w20: R28.2 4482.8,3300 4482.8,3042.2 4532,2993 U2.12
NetC30_1: C30.1 R25.2 R29.1 U2.5 | length 805.4
  Top Layer w20: R25.2 v1@4260,2636 ; v1@4261,2637 4320,2637 R29.1 4320,2589 4342,2567 4406,2567 4420,2581 C30.1 ; v1@4266,2893 U2.5
  Bottom Layer w20: v1@4257,2645 v1(4257,2894)
  other v1: 4251,2639
NetC31_1: C31.1 HD9.1 HD10.1 HD11.1 R30.2 | length 2117.1
  Top Layer w8: HD9.1 HD9.1@5206,3186
  Top Layer w20: R30.2 v1@4713,3460 ; C31.1 HD11.1@5206.48,2452.48
  Top Layer w30: HD11.1 5216,2596 5260,2640 HD10.1
  Bottom Layer w8: v1@4716.5,3465.5 v1(4713,3462) ; HD10.1 HD10.1@5320,2780 ; HD10.1@5320,2763 HD10.1@5320,2780 ; 5331,2780 HD10.1@5320,2780 ; v1(4713,3462) 4713,3469 4710,3472 4710,3465 v1(4713,3462)
  Bottom Layer w20: v1@4725.5,3465.5 4810.5,3465.5 4832,3487 5092,3487 5141,3438 5263,3438 5304,3397 5304,3238 HD9.1@5245,3179
  Bottom Layer w30: HD9.1@5193,3175 5304,3175 5362,3117 5362,2811 5331,2780
NetHD1_4: HD1.4 U1.12 | length 635.9
  Top Layer w8: HD1.4@3305,3816 3448,3816 3483.5,3851.5 U1.12
NetHD1_5: HD1.5 U1.11 | length 668
  Top Layer w8: HD1.5 3432,3920 3484.76,3867.24 U1.11
NetHD2_3: HD2.3 R2.2 R2.3 | length 558
  Bottom Layer w20: HD2.3@4480,4800 4480,4520 R2.3
  Bottom Layer w30: R2.2@4620,4300 R2.3
NetHD2_4: HD2.4 R3.2 | length 227.5
  Top Layer w20: R3.2 HD2.4@4380,4800
NetHD2_5: HD2.5 R4.2 | length 227.5
  Top Layer w20: R4.2 HD2.5@4280,4800
NetHD2_6: HD2.6 R5.2 | length 227.5
  Top Layer w20: R5.2 HD2.6@4180,4800
NetHD2_7: HD2.7 R6.2 | length 227.5
  Top Layer w20: R6.2 HD2.7@4080,4800
NetHD2_8: HD2.8 R7.2 | length 227.5
  Top Layer w20: R7.2 HD2.8@3980,4800
NetHD2_9: HD2.9 R8.2 | length 227.5
  Top Layer w20: R8.2 HD2.9@3880,4800
NetHD2_10: HD2.10 R9.2 | length 227.5
  Top Layer w20: R9.2 HD2.10@3780,4800
NetHD2_11: HD2.11 R10.2 | length 226
  Top Layer w20: R10.2 HD2.11@3680,4800
NetHD2_12: HD2.12 Q1.3 | length 344.1
  Top Layer w20: Q1.3 3542.6,4561.6 3606,4625 3606,4718 3580,4744 HD2.12@3580,4800
NetHD3_1: HD3.1 U1.48 | length 1266.8
  Top Layer w8: U1.48 4372.88,3977.48 4419.4,4024 4878.4,4024 4990,3912.4 4990,3749 5063,3676 HD3.1@5239,3676
NetHD3_2: HD3.2 U1.49 | length 1119.6
  Top Layer w8: U1.49 4368.83,3993.23 4413.6,4038 4884.2,4038 5004,3918.2 5004,3842 5068,3778 HD3.2@5180,3778
NetHD3_3: HD3.3 U1.50 | length 1037.8
  Top Layer w8: U1.50 4364.78,4008.98 4407.8,4052 4890,4052 5062,3880 HD3.3
NetHD3_4: HD3.4 U1.51 | length 1002.7
  Top Layer w8: U1.51 4360.72,4024.72 4402,4066 4900,4066 4989,3977 HD3.4@5180,3977
NetHD5_1: HD5.1 R14.1 | length 162.6
  Top Layer w8: HD5.1@5087,4447 HD5.1
  Top Layer w20: R14.1 HD5.1@5087,4447
NetHD6_4: HD6.4 HD9.2 Q3.3 R19.1 | length 3554.5
  Top Layer w30: R19.1 Q3.3 4640,1929 4697,1872 5387,1872 5447,1932 5447,3186 5354,3279 HD9.2@5233,3279 ; HD6.4 4910,977 4956,977 5010,1031 5010,1869
NetHD7_1: HD7.1 R15.2 RG3.1 | length 765.8
  Top Layer w30: HD7.1@3398,2159 3668,2159 ; 3696,2159 3668,2159 ; RG3.1@3741,1749 3741,2133 3715,2159 3668,2159
NetHD8_1: HD8.1 R16.2 RG4.1 | length 447.3
  Top Layer w8: RG4.1 RG4.1@4260,1734
  Top Layer w30: RG4.1@4260,1734 RG4.1@4260,1741 ; RG4.1@4276,1741 RG4.1@4260,1741 ; 4333,1815 4333,1761 4313,1741 RG4.1@4260,1741 ; R16.2@4340,1845 HD8.1@4340,2127
NetHD9_3: HD9.3 Q2.3 R18.1 | length 1109.9
  Top Layer w20: v1@4680,3240 R18.1 ; Q2.3 4943,3640 HD9.3@5194,3389
  Bottom Layer w20: v1(4678,3228) 4979,3228 5131,3380 HD9.3
NetQ1_1: Q1.1 R11.2 | length 340.4
  Top Layer w20: Q1.1 3505.2,4183.8 3540,4149 R11.2
NetQ2_1: Q2.1 R17.2 | length 91.5
  Top Layer w8: Q2.1@4795.51,3540 Q2.1
  Top Layer w20: R17.2 Q2.1@4795.51,3540
NetQ3_1: Q3.1 R19.2 R22.1 R23.1 R24.1 | length 468.9
  Top Layer w30: R19.2 R22.1@4798.52,2214 ; R22.1@4794,2212.52 R22.1 R23.1 R24.1@4956,2212.52 ; Q3.1@4840,2047 4840,2070 4841,2071 4841,2195
NetQ4_1: Q4.1 R26.2 | length 123
  Top Layer w8: Q4.1@4566,2538.49 Q4.1
  Top Layer w20: Q4.1@4566,2538.49 R26.2
NetQ4_3: Q4.3 R22.2 R23.2 R24.2 | length 575.9
  Top Layer w20: R22.2@4794,2283.48 R22.2@4799,2278.48
  Top Layer w30: Q4.3 4830,2500 4914,2416 4914,2290 ; R22.2@4799,2278.48 R24.2@4953,2278.48
NetR3_1: R3.1 U1.68 | length 968.1
  Top Layer w8: v1@3887,4369 3849,4331 3849,4173 3952.76,4069.24 U1.68 ; R3.1 R3.1@4382,4505.52
  Top Layer w20: v1(4382,4392) R3.1@4382,4505.52
  Bottom Layer w8: v1(3911,4372) 3913,4374 3948,4374 3963,4389 4368,4389 v1@4376,4381
NetR4_1: R4.1 U1.1 | length 961.7
  Top Layer w8: v1@3851,4412 3851,4361 3835,4345 3835,4073 3883.28,4024.72 U1.1 ; v1@4280,4431 v1(4281,4430)
  Top Layer w20: v1@4280,4431 R4.1
  Bottom Layer w8: v1(3849,4414) v1@4276,4414
NetR5_1: R5.1 U1.66 | length 671.2
  Top Layer w8: v1@3984,4340 4009,4315 4009,4171 3984.25,4146.25 U1.66 ; v1@4180,4348 v1(4181,4347)
  Top Layer w20: v1@4180,4348 R5.1
  Bottom Layer w8: v1(3974,4339) v1@4175,4339
NetR6_1: R6.1 U1.62 | length 469.8
  Top Layer w8: U1.62 4047.24,4120.65 4068,4141.4 4068,4433 4080,4445 R6.1
NetR7_1: R7.1 U1.63 | length 496.2
  Top Layer w8: R7.1 3980,4431 4054,4357 4054,4147.2 4031.5,4124.7 U1.63
NetR8_1: R8.1 U1.64 | length 559
  Top Layer w8: R8.1 3880,4466 3902,4444 3947.2,4444 4040,4351.2 4040,4153 4015.75,4128.75 U1.64
NetR9_1: R9.1 U1.65 | length 634
  Top Layer w8: R9.1 3780,4476 3807,4449 3874,4449 3893,4430 3941.4,4430 4023,4348.4 4023,4163 4000,4140 U1.65
NetR11_1: R11.1 U1.2 | length 384.2
  Top Layer w8: R11.1@3541.98,4008.98 U1.2
NetR17_1: R17.1 U2.1 U2.2 | length 902.8
  Top Layer w20: v1@4257,3093 v1(4265,3093) U2.1 ; v1@4265,3083 4305,3043 U2.2 ; v1@4598,3539 R17.1@4645,3539
  Bottom Layer w20: v1(4265,3093) 4265,3137 4577,3449 v1(4577,3541)
NetR20_2: R20.2 R21.2 R27.1 U2.13 | length 635.4
  Top Layer w20: U2.13 4738,3043 4767,3072 4767,3110 4780,3123 R27.1 R21.2@4879,3327 ; R20.2 R21.2
NetR26_1: R26.1 U2.8 U2.9 | length 484.1
  Top Layer w8: R26.1 R26.1@4636,2663
  Top Layer w20: U2.8 4722,2793 ; U2.9 4681,2843 4723,2801 4723,2693 4693,2663 R26.1@4636,2663
NetR28_1: R28.1 U1.31 | length 510.7
  Top Layer w8: U1.31 4157.48,3711.32 4326,3542.8 4326,3318 R28.1@4335,3309
NetR30_1: R30.1 U1.32 | length 533.9
  Top Layer w8: U1.32 4173.23,3720.77 4434,3460 4552.52,3460 R30.1@4567.52,3475
NetU1_29: U1.29 U2.6 U2.7 | length 1266.3
  Top Layer w8: U1.29 4125.98,3700.02 4186.5,3639.5 4186.5,2894.5 4239,2842 ; U2.6@4381,2842 4239,2842 ; U2.7 4288,2793 4239,2842
NetU1_30: U1.30 U2.3 | length 906.5
  Top Layer w8: U1.30 4141.73,3707.27 4203,3646 4203,3057 4268,2992 U2.3@4368,2992
NetU2_10: U2.10 U2.14 | length 448.4
  Top Layer w20: U2.10 v1@4714,2893 ; U2.14 v1@4705,3093
  Bottom Layer w20: v1@4726,2896 4728.52,3075.04 v1(4713,3091) 4722,3091 4726,3095 v1@4726.16,3091.61
  other v1: 4721,2883
pads on no net: HD1.6 HD2.13 HD3.6 HD4.3 HD5.3 HD6.5 HD7.3 HD8.3 HD9.4 HD10.3 HD11.3 U1.3 U1.4 U1.13 U1.14 U1.15 U1.16 U1.18 U1.19 U1.20 U1.21 U1.22 U1.23 U1.27 U1.28 U1.33 U1.34 U1.36 U1.37 U1.38 U1.39 U1.46 U1.47 U1.53 U1.54 U1.55 U1.56 U1.60 U1.61

## Polygon pours and split planes (outlines as drawn)
FAN_GND on Top Layer "Fan_GND_Top" (solid, remove dead copper, shelved, pour order 1001): 5451,1027 5447,1023 5089,1023 5089,1020 4794,725 4428,725 4428,1156 4421,1163 4424,1166 5010,1166 5010,1871 5009,1872 5005,1876 4500,1876 4500,2355 4492,2363 4488,2359 4145,2359 4145,2718 4141,2722 4070.52,2792.48 4054,2792.48 3911.52,2792.48 3907,2797 3896,2808 3896,3394 4288,3394 4601,3707 4609,3707 4877,3707 4983,3601 5025,3601 5432,3601 5436,3605
NetC26_1 on Top Layer "TIP32" (solid, remove dead copper, shelved, pour order 1000): 4980,1848 4980,1189 4498,1189 4498,1848
GND on Top Layer "TopGND" (solid, remove dead copper, shelved, pour order 1005): 3048,3401 3048,540 3044,536 3048,540 5457,540 5457,984 5444,997 5108,997 4805,694 4789,710 3318,710 3318,1591 4477,1591 4477,2318 4493,2334 4485,2342 4115,2342 4115,2725 4074,2766 4062,2778 3879,2778 3879,3372 3854,3397
CGND on Top Layer "TopCGND" (solid, remove dead copper, shelved, pour order 1006): 3052,4954 5457,4954 5469,4942 5469,3609 4980,3609 4971,3600 4909,3662 4909,3717 4594,3717 4556,3679 4286,3409 3052,3409
9VDC on Top Layer "Top9V" (solid, remove dead copper, shelved, pour order 1007): 3928,1527 3928,816 3930,814 3932,812 4403,812 4403,1522 4400,1525
6VDC on Top Layer "Top6V" (solid, remove dead copper, shelved, pour order 1008): 3423,1544 3423,748 3891,748 3891,1543
FAN_GND on Bottom Layer "Fan_GND_Bottom" (solid, remove dead copper, shelved, pour order 1003): 5451,1031 5089,1031 4791,733 4791,729 4431,729 4428,732 4432,736 4432,1151 4998,1151 5017,1170 5006,1181 5006,1880 4515,1880 4504,1891 4500,1895 4500,2356 4144,2356 4141,2359 4145,2363 4145,2729 4145,2744 4088,2801 4080,2809 3911,2809 3911,3390 3915,3386 4262,3386 4288,3386 4602,3700 4609,3707 4821,3707 4821,3695 4843,3673 5013,3673 5029,3673 5104,3598 5108,3594 5417,3594
NetC26_1 on Bottom Layer "TIP32Bottom" (solid, remove dead copper, shelved, pour order 1002): 4980,1848 4980,1187 4498,1187 4498,1846 4496,1848
GND on Bottom Layer "BottomGND" (solid, remove dead copper, shelved, pour order 1001): 3048,3401 3052,3397 3887,3397 3887,2778 3891,2774 3899,2766 4066,2766 4066,2765 4111,2720 4124,2707 4124,2338 4473,2338 4477,2342 4481,2338 4481,1574 3339,1574 3322,1591 3318,1587 3318,714 4804,714 4817,727 5087,997 5108,997 5453,997 5453,548 5445,540 3048,540
9VDC on Bottom Layer "Bottom9V" (solid, remove dead copper, shelved, pour order 1003): 3928,1527 3929,1528 4404,1528 4404,811 4401,808 4397,812 3926,812
6VDC on Bottom Layer "Bottom6V" (solid, remove dead copper, shelved, pour order 1004): 3430,1553 3430,756 3429,755 3430,754 3900,754 3900,1550 3903,1553
CGND on Bottom Layer "BottomCGND" (solid, remove dead copper, shelved, pour order 1002): 3052,4954 5386,4954 5386,3613 5378,3605 5368,3615 4996,3615 4936,3615 4826,3725 4814,3737 4610,3737 4610,3729 4286,3405 4278,3397 3056,3397

## Silkscreen, mask and mechanical layers (free items; w line width, h text height)
Top Overlay:
  circle w10: c3275.46,4368 r129.54
  lines w10: 3802,4396 3802,4449 3839,4486 ; 4389,3647 4389,3693
  text "LCD" at 3266,4864 h60
  text "LED" at 5339,4543 h60 r270
  text "DRJ" at 3193,4339 h60
  text "Buttons" at 5334,4090 h60 r270
  text "Prog" at 3032,3904 h60 r270
  text "FAN1" at 5359,3374 h60 r270
  text "FAN2" at 5406,2946 h60 r270
  text "I Sense" at 5425,2578 h60 r270
  text "9V" at 4025,2241 h60
  text "6V" at 3536,2214 h60
  text "25W 1ohm" at 5007,2082 h60
  text "12Vin" at 3130,831 h60
  text "EQF1248  Fan Fixture Rev1" at 3342,624 h60
  text "DRJ" at 2485,-284 h60

## Text inside footprints (layer, text, board x,y; h text height)
HD1: Top Overlay "1" at 3263,3398 h50 r270
HD2: Top Overlay "1" at 4812,4803 h62.5
HD3: Top Overlay "1" at 5165,3571 h50 r270
HD4: Top Overlay "1" at 3395,1085 h37.5
HD5: Top Overlay "1" at 4962,4349 h37.5
HD6: Top Overlay "1" at 4460,952 h50
HD7: Top Overlay "1" at 3551,2141 h37.5
HD8: Top Overlay "1" at 4467,2178 h37.5
HD9: Top Overlay "1" at 5242,3049 h37.5 r270
HD10: Top Overlay "1" at 5308,2646 h37.5 r270
HD11: Top Overlay "1" at 5308,2599 h37.5 r270
Q3: Top Overlay "1" at 4912,2048 h37.5 r180
RG3: Top Overlay "1" at 3828,1728 h37.5 r180
RG4: Top Overlay "1" at 4336,1740 h37.5 r180